# Altium PCB pedala.PcbDoc
Units mm, origin at the board's own origin, x right, y up, seen from the top; angles counter-clockwise.
Board outline 77.25 x 121.25 mm, 2 copper layers (Top Layer, Bottom Layer); 65 components, 53 nets, 200 pads, 0 vias.
Unrouted connection lines stored in the file: 1.
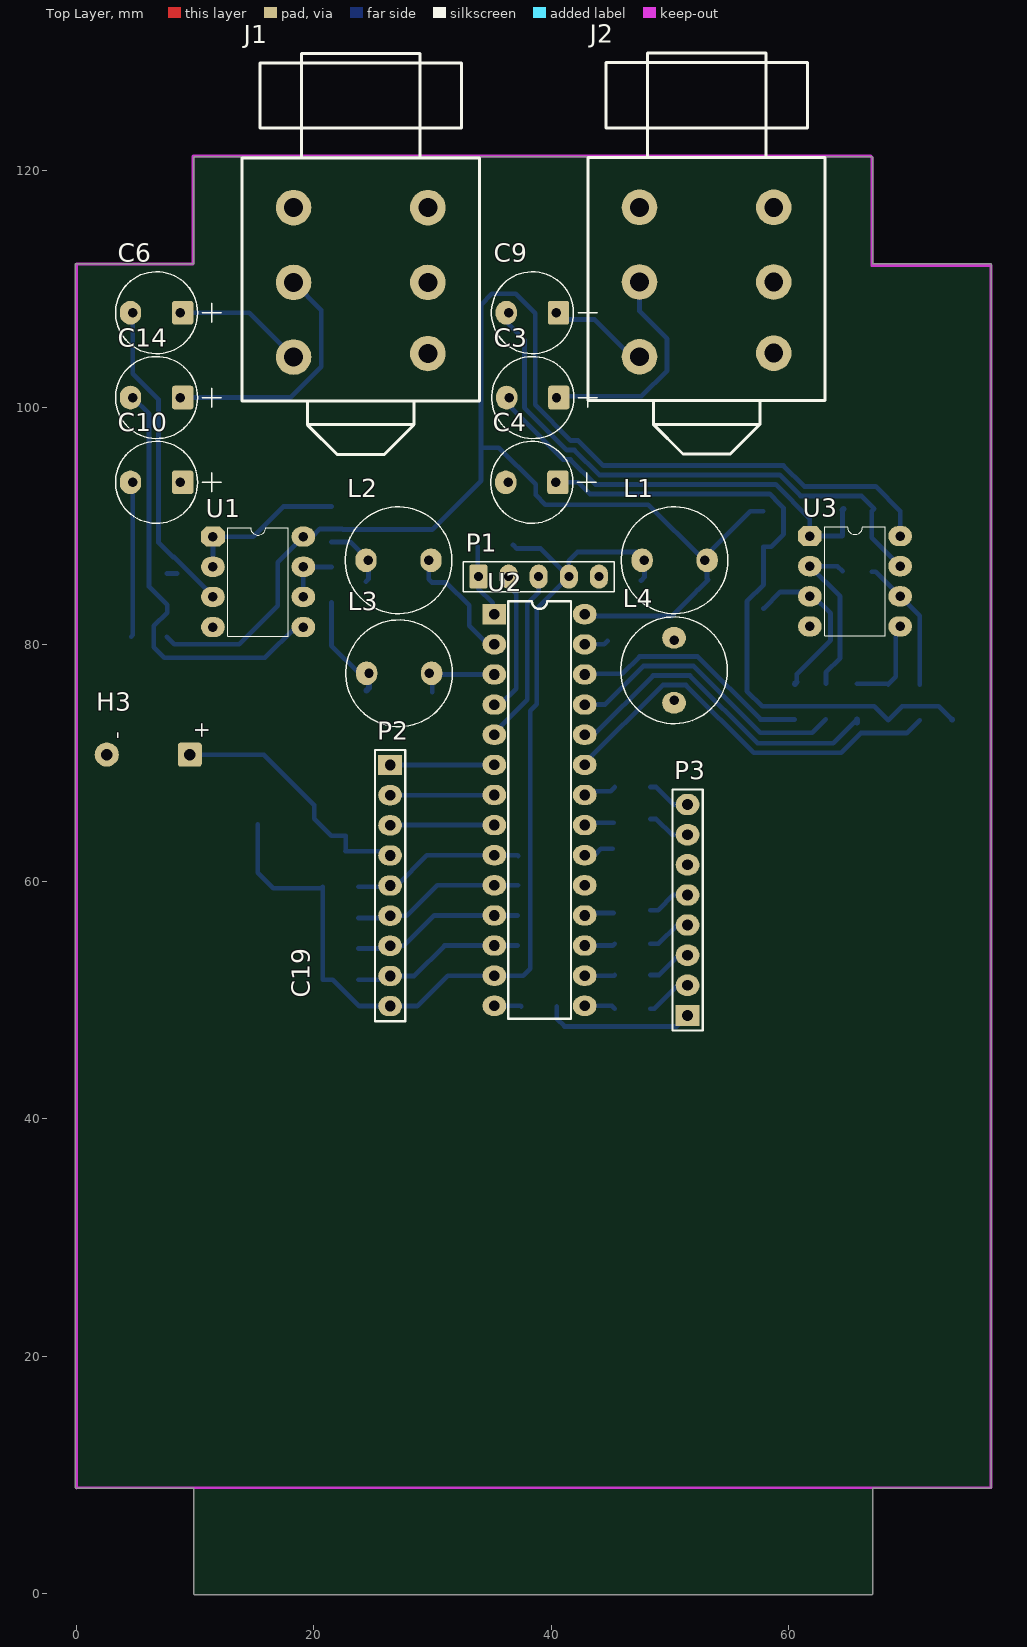
[diagram p0: Top Layer view]
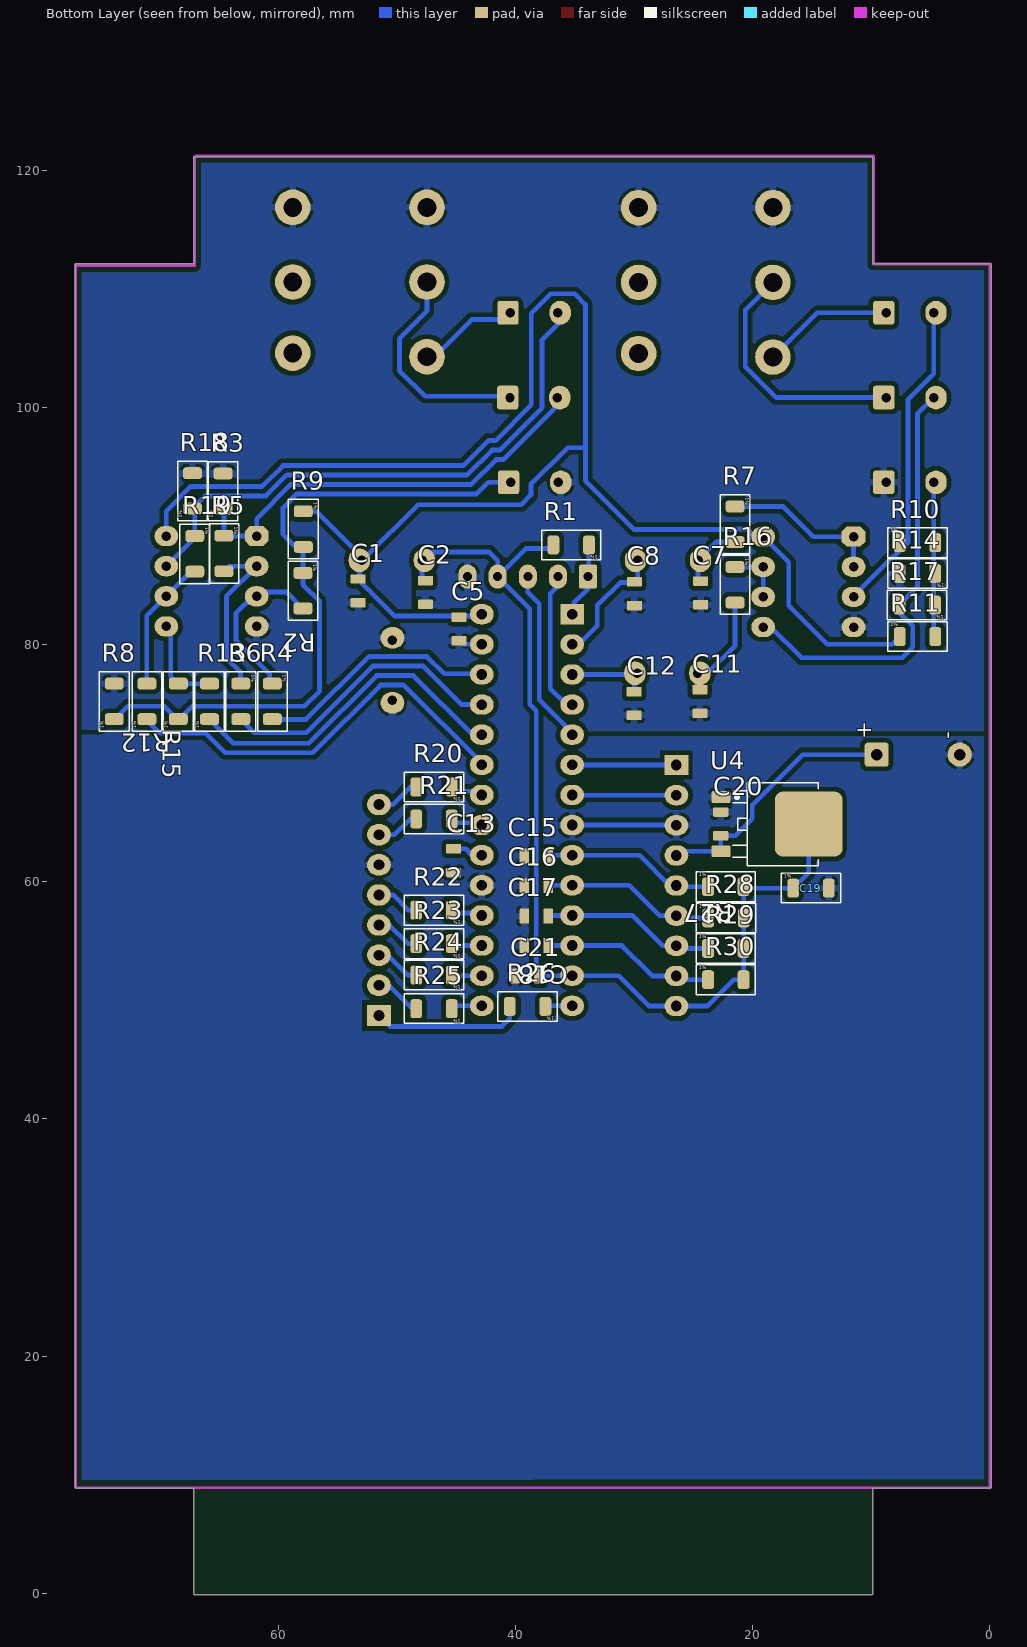
[diagram p1: Bottom Layer view, seen from below]
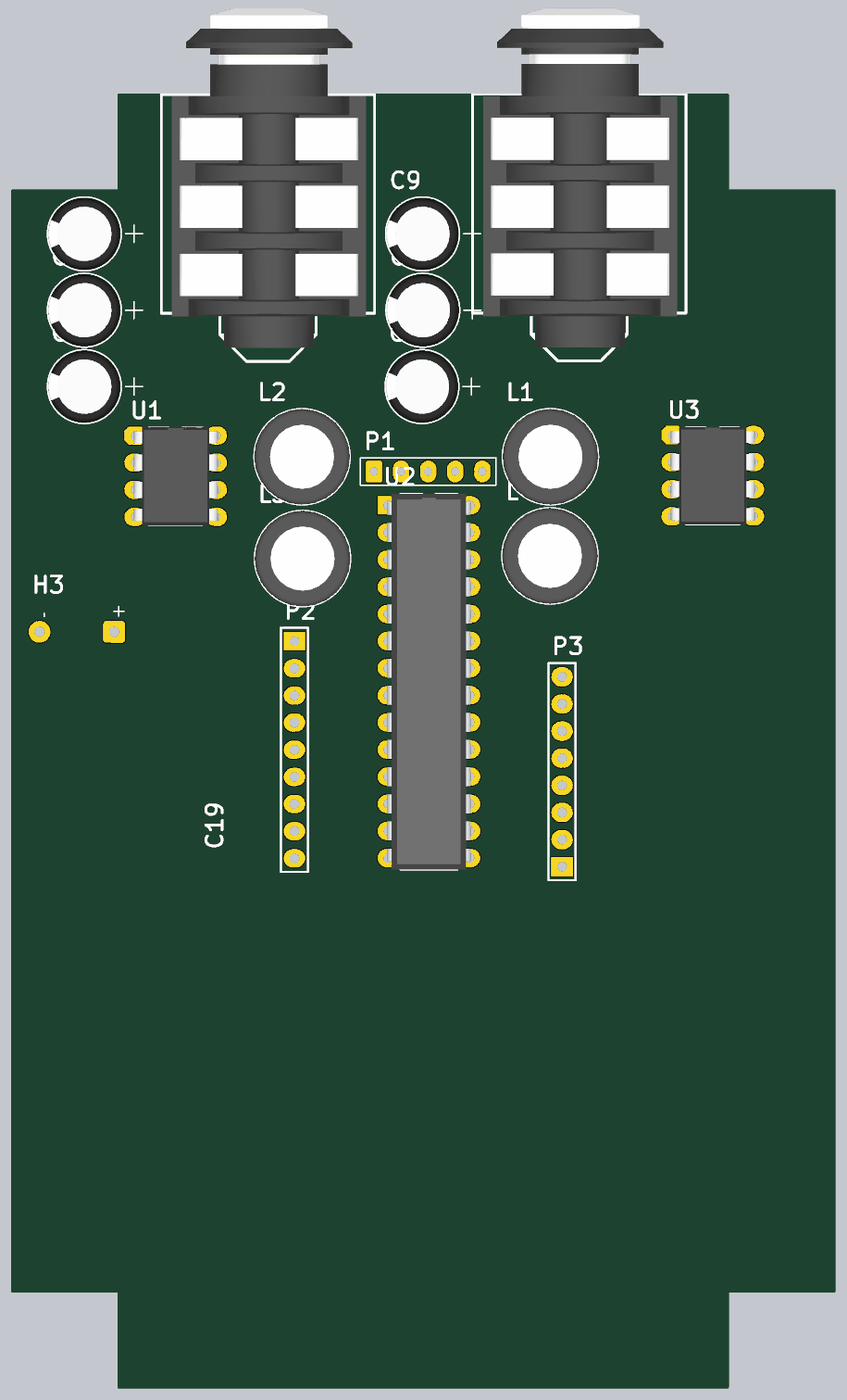
[diagram p2: 3D render of the assembled board from above, using the file's embedded part models]
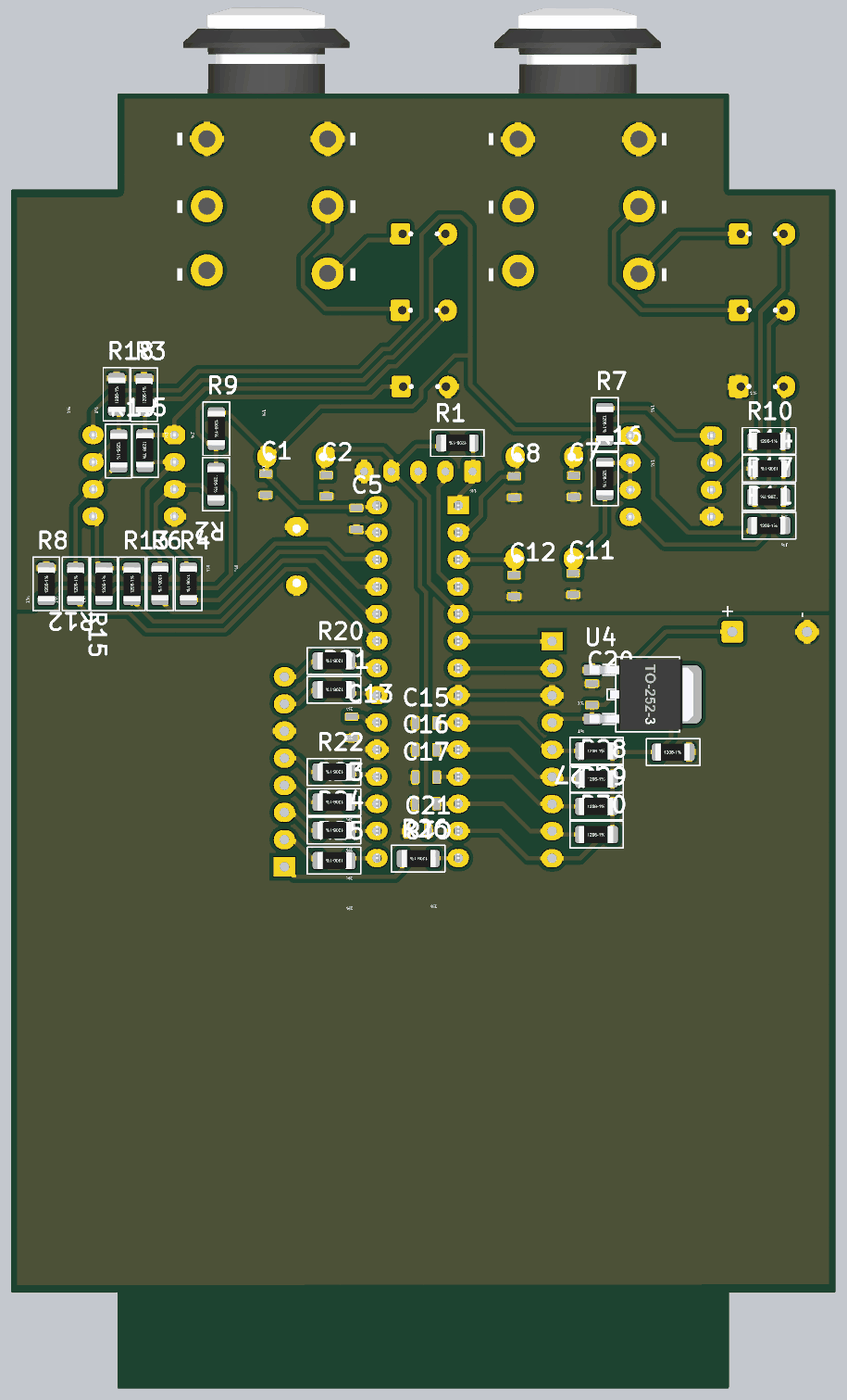
[diagram p3: 3D render of the assembled board from below, using the file's embedded part models]

## Layer stack, top to bottom
Top Solder: solder mask 0.0102, Solder Resist, Dk 3.5
Top Layer: signal copper 0.0356
Dielectric 1: dielectric 0.32, FR-4, Dk 4.8
Bottom Layer: signal copper 0.0356
Bottom Solder: solder mask 0.0102, Solder Resist, Dk 3.5

## Board outline
9.873,0 9.873,8.873 0,8.873 cw(c0,9) -0.127,9 -0.127,112 cw(c0,112) 0,112.127 9.873,112.127 9.873,121 cw(c10,121) 10,121.127 67,121.127 cw(c67,121) 67.127,121 67.127,112.127 77,112.127 cw(c77,112) 77.127,112 77.127,9 cw(c77,9) 77,8.873 67.127,8.873 67.127,0 cw(c67,0) 67,-0.127 10,-0.127 cw(c10,0)

## Design rules (kind name [scope] priority, off if disabled: settings)
Clearance Clearance_1 [InNet('No Net') vs InNet('No Net')] p1: gap=1
Clearance [InNet('GND')] p2: gap=0.4
PlaneClearance [All] p1: clearance=0.3
PlaneConnect [All] p1: planeconnectstyle=Direct reliefexpansion=0.508 reliefentries=4 reliefconductorwidth=0.254 reliefairgap=0.254
PolygonConnect [All] p1: connectstyle=Relief reliefconductorwidth=0.6 reliefentries=4 polygonreliefangle="90 Angle" airgapwidth=0.254
RoutingVias [All] p1: holewidth=0.711 width=1.27 viastyle="Through Hole" minholewidth=0.711 minwidth=1.27 maxholewidth=0.711 maxwidth=1.27
SolderMaskExpansion [All] p1: expansion=0.102
Width [All] p1: maxlimit=0.4 minlimit=0.4 preferedwidth=0.4
28 further rules are at their usual default settings.

## Components (designator, comment, footprint, x,y, rotation, side; value= is the part's Value field where it differs from the comment)
C1 "100n" 0805-CAP-HC#1 53.26,84.53 r90 bottom
C2 "100n" 0805-CAP-HC#1 47.59,84.4 r90 bottom
C3 "10µ" CAPAE250P680X1220_VERT 38.46,100.83 r180 top
C4 "10µ" CAPAE250P680X1220_VERT 38.38,93.68 r180 top
C5 "100n" 0805-CAP-HC#1 44.77,81.31 r90 bottom
C6 "10µ" CAPAE250P680X1220_VERT 6.74,107.98 r180 top
C7 "100n" 0805-CAP-HC#1 24.39,84.36 r90 bottom
C8 "100n" 0805-CAP-HC#1 29.97,84.29 r90 bottom
C9 "10µ" CAPAE250P680X1220_VERT 38.43,107.98 r180 top
C10 "10µ" CAPAE250P680X1220_VERT 6.74,93.68 r180 top
C11 "100n" 0805-CAP-HC#1 24.45,75.2 r90 bottom
C12 "100n" 0805-CAP-HC#1 29.99,75.03 r90 bottom
C13 "100n" 0805-CAP-HC#1 45.209,61.78 r90 bottom
C14 "10µ" CAPAE250P680X1220_VERT 6.74,100.83 r180 top
C15 "100n" 0805-CAP-HC#2 38.24,62.177 r0 bottom
C16 "100n" 0805-CAP-HC#2 38.24,59.67 r0 bottom
C17 "100n" 0805-CAP-HC#2 38.24,57.107 r0 bottom
C18 "100n" 0805-CAP-HC#2 38.25,54.63 r0 bottom
C19 "10µ" R1206-1% 15.08,59.46 r180 bottom
C20 "100n" 0805-CAP-HC#1 22.69,64.88 r270 bottom
C21 "100n" 0805-CAP-HC#1 39.03,52.07 r180 bottom
H3 "BATTERY" HDR_1X2X276 6.04,70.72 r270 top
J1 "Phone-Jack 6.3mm Stereo SW" "PHONE-JACK STEREO SW 6.3MM" 15.75,104.24 r0 top
J2 "Phone-Jack 6.3mm Stereo SW" "PHONE-JACK STEREO SW 6.3MM" 44.92,104.27 r0 top
L1 "INDC_180u_Toroid" DR-CW8A 50.42,87.11 r180 top
L2 "INDC_180u_Toroid" DR-CW8A 27.14,87.11 r0 top
L3 "INDC_180u_Toroid" DR-CW8A 27.19,77.58 r0 top
L4 "INDC_180u_Toroid" Dr-CW8A 50.37,77.83 r270 top
P1 "Programmer" HDR1X5_2.54MMP 33.88,85.73 r0 top
P2 "Header 9" HDR1X9 26.43,69.84 r270 top
P3 "Header 8" HDR1X8 51.51,48.73 r90 top
R1 "Thick Film" R1206-1% 35.3,88.4 r0 bottom
R2 "Thick Film" R1206-1% 57.92,84.54 r270 bottom
R3 "Thick Film" R1206-1% 64.66,92.93 r90 bottom
R4 "Thick Film" R1206-1% 60.5,75.21 r270 bottom
R5 "Thick Film" R1206-1% 64.58,87.68 r270 bottom
R6 "Thick Film" R1206-1% 63.16,75.21 r270 bottom
R7 "Thick Film" R1206-1% 21.48,90.15 r270 bottom
R8 "Thick Film" R1206-1% 73.83,75.21 r90 bottom
R9 "Thick Film" R1206-1% 57.89,89.74 r270 bottom
R10 "Thick Film" R1206-1% 6.1,88.59 r180 bottom
R11 "Thick Film" R1206-1% 6.1,80.67 r180 bottom
R12 "Thick Film" R1206-1% 68.43,75.21 r90 bottom
R13 "Thick Film" R1206-1% 65.8,75.21 r90 bottom
R14 "Thick Film" R1206-1% 6.1,85.99 r0 bottom
R15 "Thick Film" R1206-1% 71.08,75.21 r90 bottom
R16 "Thick Film" R1206-1% 21.48,85.04 r270 bottom
R17 "Thick Film" R1206-1% 6.13,83.34 r0 bottom
R18 "Thick Film" R1206-1% 67.24,92.96 r90 bottom
R19 "Thick Film" R1206-1% 67.04,87.65 r270 bottom
R20 "Thick Film" R1206-1% 46.87,67.99 r0 bottom
R21 "Thick Film" R1206-1% 46.87,65.29 r0 bottom
R22 "Thick Film" R1206-1% 46.87,57.6 r0 bottom
R23 "Thick Film" R1206-1% 46.87,54.78 r0 bottom
R24 "Thick Film" R1206-1% 46.87,52.13 r0 bottom
R25 "Thick Film" R1206-1% 46.87,49.3 r0 bottom
R26 "Thick Film" R1206-1% 38.98,49.49 r0 bottom
R27 "Thick Film" R1206-1% 22.26,59.58 r180 bottom
R28 "Thick Film" R1206-1% 22.25,56.95 r180 bottom
R29 "Thick Film" R1206-1% 22.26,54.38 r180 bottom
R30 "Thick Film" R1206-1% 22.26,51.74 r180 bottom
U1 "OPA2350" DIL8-300A 15.3,85.29 r270 top
U2 "DSPIC33FJ128GP802-I/SP" DIP28-300 39.03,66.05 r0 top
U3 "OPA2350" DIL8-300A 65.63,85.34 r270 top
U4 "lm117 3v3" TO-252 18.97,64.86 r270 bottom

## Footprints (in the part's own frame and the unit in brackets; to place one, negate y for a bottom-side part, rotate by r counter-clockwise, add the part's x,y. Pads: shape width x height; smd on the part's side, far side on the other; paste and mask are expansions set on the pad)
0805-CAP-HC#1 [mm] "Capacitor, 0805, High Capacity"
  rrect20% 0.8x1.27 smd paste-0.076 mask+0.051: 1(-1,0) 2(1,0)
  body extent -1,-0.63 1,0.63, height 1.26
0805-CAP-HC#2 [mm] "Capacitor, 0805, High Capacity"
  rrect20% 0.8x1.27 smd paste-0.076 mask+0.051: 1(1,0) 2(-1,0)
  body extent -1,-0.63 1,0.63, height 1.26
CAPAE250P680X1220_VERT [mm]
  round 0.508 on Mech15: 0(0,0)
  rrect25% 1.8x2 hole 0.8 copper offset -0.2,0: 1(-2,0)
  oval 1.8x2 hole 0.8 copper offset 0.2,0: 2(2,0)
  silkscreen extent -5.45,-3.46 3.46,3.46, body extent -3.37,-3.37 3.37,3.37, height 12.2
DIL8-300A [mm]
  oct 1.7x2 hole 0.8: 1(-3.81,-3.81)
  oval 1.7x2 hole 0.8: 2(-1.27,-3.81) 3(1.27,-3.81) 4(3.81,-3.81) 5(3.81,3.81) 6(1.27,3.81) 7(-1.27,3.81) 8(-3.81,3.81)
  silkscreen extent -4.58,-2.54 4.58,2.54, body extent -4.58,-3.96 4.58,3.96, height 3.88
DIP28-300 [mm] "DIP 28 Leads, Row Spacing 7.62mm; Pitch 2.54mm"
  rect 2x1.7 hole 0.9: 1(-3.81,16.51)
  oval 2x1.7 hole 0.9: 2(-3.81,13.97) 3(-3.81,11.43) 4(-3.81,8.89) 5(-3.81,6.35) 6(-3.81,3.81) 7(-3.81,1.27) 8(-3.81,-1.27) 9(-3.81,-3.81) 10(-3.81,-6.35) 11(-3.81,-8.89) 12(-3.81,-11.43) 13(-3.81,-13.97) 14(-3.81,-16.51) 15(3.81,-16.51) 16(3.81,-13.97) 17(3.81,-11.43) 18(3.81,-8.89) 19(3.81,-6.35) 20(3.81,-3.81) 21(3.81,-1.27) 22(3.81,1.27) 23(3.81,3.81) 24(3.81,6.35) 25(3.81,8.89) 26(3.81,11.43) 27(3.81,13.97) 28(3.81,16.51)
  silkscreen extent -2.65,-17.59 2.65,17.59, body extent -3.93,-17.59 3.94,17.59, height 4.57
DR-CW8A [mm]
  oval 1.8x2 hole 0.8 copper offset -0.2,0: 1(-2.54,0)
  oval 1.8x2 hole 0.8 copper offset 0.2,0: 2(2.54,0)
  silkscreen extent -4.5,-4.5 4.5,4.5, body extent -4.5,-4.5 4.5,4.5, height 13.27
Dr-CW8A [mm]
  oval 1.8x2 hole 0.8 copper offset -0.2,0: 1(-2.54,0)
  oval 1.8x2 hole 0.8 copper offset 0.2,0: 2(2.54,0)
  silkscreen extent -4.5,-4.5 4.5,4.5, body extent -4.5,-4.5 4.5,4.5, height 13.27
HDR1X5_2.54MMP [mil] "Connector; Header; 5 Position 0.100\" pitch"
  rrect25% 60x80 hole 30: 1(0,0)
  oval 60x80 hole 30: 2(100,0) 3(200,0) 4(300,0) 5(400,0)
  silkscreen extent -50,-50 450,50
HDR1X8 [mm] "Connector; Header; 8 Position"
  rect 1.8x2 hole 0.9: 1(0,0)
  oval 1.8x2 hole 0.9: 2(2.54,0) 3(5.08,0) 4(7.62,0) 5(10.16,0) 6(12.7,0) 7(15.24,0) 8(17.78,0)
  silkscreen extent -1.27,-1.27 19.05,1.27
HDR1X9 [mm] "Connector; Header; 9 Position"
  rect 1.7x2 hole 0.9: 1(0,0)
  oval 1.7x2 hole 0.9: 2(2.54,0) 3(5.08,0) 4(7.62,0) 5(10.16,0) 6(12.7,0) 7(15.24,0) 8(17.78,0) 9(20.32,0)
  silkscreen extent -1.27,-1.27 21.59,1.27
HDR_1X2X276 [mil]
  rrect25% 80x80 hole 38: 1(0,137.8)
  round 80 hole 38: 2(0,-137.8)
  body extent -20,-158 20,158
"PHONE-JACK STEREO SW 6.3MM" [mm] "SJ-6306"
  round 3 hole 1.6: 1(2.54,0) 2(2.54,6.3) 3(2.54,12.6) 4(13.86,12.6) 5(13.86,6.3) 6(13.86,0.3)
  silkscreen extent -1.8,-8.2 18.2,25.6, body extent -0.81,-6.93 17.39,24.86, height 16
R1206-1% [mm]
  rrect50% 1x1.6 smd: 1(-1.5,0) 2(1.5,0)
  silkscreen extent -2.5,-1.25 2.5,1.25, body extent -1.65,-0.81 1.55,0.79, height 0.6
TO-252 [mm] "D-PAK/TO-252-AA; 3 Leads (1 Cropped); Body 10.3 (inc. leads) x 6.7 mm (LxW max)"
  round 0.5 on Mech15: 0(0,0)
  rrect25% 1x1.6 smd: 1(-2.285,-3.7) 3(2.285,-3.7)
  rrect25% 5.5x5.7 smd: 2(0,3.7)
  silkscreen extent -3.5,-2.7 3.5,4.5, body extent -3.3,-3.95 3.3,5.76, height 2.31

## Part data
C1 C2 C5 C7 C8 C11 C12 C13 C15 C16 C17 C18 C20 C21: library part CAPC_100n_1206_NP0_50V_5%, "Capacitor SMD Cer 100nF 1206 NP0 50V 5%"
C3 C4 C6 C9 C10 C14 C19: library part CAPT_330u_2917_6V3, "Capacitor SMD Tant 330uF 20% 6V3 2917"
H3: library part Header2P, "Header, 2-pin"
L1 L2 L3 L4: "Power Inductor 180µH 10% SMD Toroid"
P1: library part Header5P, "Header 5-pin"
P2: "Header, 9-Pin"
P3: "Header, 8-Pin"
R1 R2 R3 R4 R5 R6 R7 R8 R9 R10 R11 R12 R13 R14 R15 R16 R17 R18 R19 R20 R21 R22 R23 R24 R25 R26 R27 R28 R29 R30: library part RES_1M_0805_5%, "Resistor SMD chip 1M Ohm 0.125W 5% 0805"
U1 U3: library part OPA2313ID, "1-MHz, Micropower, Low-Noise, Rail-to-Rail I/O Operational Amplifier, 1.8 to 5.5 V, -40 to 125 degC, 8-pin SOIC (D8), Green (RoHS & no Sb/Br)"
U2: "High-Performance 16-bit Digital Signal Controller, 128 KB Flash, 16 KB RAM, 28-Pin SPDIP, Industrial Temperature"
U4: library part TL317CLP, "Adjustable Regulator with 5 to 38 V Input and 1.2 to 32 V Output, 0 to 125 degC, 3-Pin TO-92 (LP), Pb-Free (RoHS)"

## Nets (pads, with @x,y where several pads share a name; then routed paths per layer and width w, separated by ;. In a path a pad name is that pad's centre, name@x,y a point inside that pad or via, vN(x,y) a via of type N, cw(c..) or ccw(c..) an arc to the next point about the centre after c; other vN are vias at no path point)
AGND: C1.1 C4.2 C5.1 C7.1 C8.1 C10.1 C11.1 C12.1 J1.3 J1.4 J2.3 J2.4 L4.1 R3.2 R8.2 R14.2 R18.2 U1.4 U2.27 U3.4 | length 3.8
  Bottom Layer w0.4: R14.2 8.471,85.99 ; U2.27@43.13,80.31 U2.27 44.48,80.02 C5.1 ; L4.1@50.07,80.07 L4.1
"AUDIO IN LEFT": C6.1 J1.1 | length 11.1
  Bottom Layer w0.4: C6.1 14.55,107.98 J1.1
"AUDIO IN RIGHT": C14.1 J1.2 | length 21
  Bottom Layer w0.4: C14.1 18.01,100.83 20.62,103.44 20.62,108.21 J1.2
BUT1: C15.2 P2.5 R27.1 U2.9 | length 14.6
  Bottom Layer w0.4: R27.1 26.33,59.58 P2.5 26.98,59.68 29.54,62.24 U2.9 37.177,62.24 C15.2
BUT2: C16.2 P2.6 R28.1 U2.10 | length 14.6
  Bottom Layer w0.4: R28.1 26.24,56.95 P2.6 27.84,57.14 30.4,59.7 U2.10 C16.2@37.21,59.7
BUT3: C17.2 P2.7 R29.1 U2.11 | length 14.6
  Bottom Layer w0.4: R29.1 26.21,54.38 P2.7 27.6,54.6 30.16,57.16 U2.11 C17.2@37.187,57.16
BUT4: C18.2 P2.8 R30.1 U2.12 | length 14.6
  Bottom Layer w0.4: R30.1 26.11,51.74 P2.8 28.46,52.06 31.02,54.62 U2.12 C18.2@37.17,54.62
D1: R26.1 U2.14 | length 2.3
  Bottom Layer w0.4: U2.14 37.43,49.54 R26.1
D2: R25.1 U2.15 | length 2.6
  Bottom Layer w0.4: U2.15 45.13,49.54 R25.1
D3: R24.1 U2.16 | length 2.6
  Bottom Layer w0.4: U2.16 45.32,52.08 R24.1
D4: R23.1 U2.17 | length 2.6
  Bottom Layer w0.4: U2.17 45.21,54.62 R23.1
D5: R22.1 U2.18 | length 2.1
  Bottom Layer w0.4: U2.18@43.19,57.37 R22.1@45.28,57.37
D6: R21.1 U2.21 | length 2
  Bottom Layer w0.4: U2.21@43.27,64.97 R21.1@45.29,64.97
D7: R20.1 U2.22 | length 2.8
  Bottom Layer w0.4: U2.22 43.16,67.64 45.02,67.64 R20.1
DAC1A: R15.1 U2.23 | length 34.6
  Bottom Layer w0.4: U2.23@42.7,70.08 42.9,70.08 49.41,76.59 51.376,76.59 57.086,70.88 64.462,70.88 66.122,72.54 70,72.54 R15.1@71.08,73.62
DAC1B: R13.1 U2.24 | length 28.6
  Bottom Layer w0.4: U2.24@42.7,72.45 43.66,72.45 48.6,77.39 51.707,77.39 57.417,71.68 63.79,71.68 R13.1@65.8,73.69
  Bottom Layer w0.5: R13.1@65.8,73.42 R13.1@65.8,73.69
DAC2A: R6.2 U2.25 | length 24.5
  Bottom Layer w0.4: U2.25 44.541,74.94 47.791,78.19 52.039,78.19 57.659,72.57 62.02,72.57 R6.2
DAC2B: R4.2 U2.26 | length 20.7
  Bottom Layer w0.4: U2.26@42.7,77.53 46,77.53 47.46,78.99 52.37,78.99 57.67,73.69 R4.2@60.56,73.69
GND: C2.1 C13.1 C15.1 C16.1 C17.1 C18.1 C19.2 C20.1 C21.1 H3.2 L4.2 P1.5 P2.3 P3.6 U2.8 U2.19 U4.1 | length 8.8
  Bottom Layer w0.4: P2.3 26.45,64.78 U2.8
"LEFT BUFFER": C8.2 L2.2 U2.2 | length 10.3
  Bottom Layer w0.4: L2.2 29.68,85.52 29.97,85.23 31.17,85.23 33.1,83.3 33.1,81.58 34.61,80.07 U2.2@35.08,80.07
MCLR: P1.1 R1.1 U2.1 | length 6.2
  Bottom Layer w0.4: R1.1@33.81,88.28 33.81,85.8 P1.1 33.88,84.72 35.08,83.52 U2.1@35.08,82.61
NetC3_2: C3.2 R3.1 R5.1 U3.1 | length 36.5
  Bottom Layer w0.4: C3.2 36.46,100.151 41.011,95.6 41.637,95.6 43.737,93.5 58.937,93.5 61.82,90.617 U3.1 64.55,89.15 R5.1 R3.1@64.58,91.35
  Bottom Layer w0.5: R3.1@64.58,91.35 R3.1
NetC4_1: C4.1 R2.1 R8.1 R9.2 R12.1 | length 56.6
  Bottom Layer w0.4: C4.1 42.283,93.68 43.263,92.7 58.432,92.7 59.29,91.842 59.29,91.83 59.61,91.51 59.61,89.3 58.55,88.24 R9.2 57.92,88.21 R2.1 57.92,85.042 56.52,83.642 56.52,76.08 57.8,74.8 59.638,74.8 59.648,74.81 61.452,74.81 61.462,74.8 62.248,74.8 62.258,74.81 64.062,74.81 64.072,74.8 64.888,74.8 64.898,74.81 67.26,74.81 68.43,73.64 69.6,74.81 72.68,74.81 R8.1@73.82,73.67
  Bottom Layer w0.5: R8.1@73.82,73.67 R8.1@73.83,73.66
NetC6_2: C6.2 R10.1 U1.3 | length 26.8
  Bottom Layer w0.4: C6.2 4.74,102.851 6.9,100.691 6.9,88.61 8.12,87.39 8.202,87.39 11.49,84.102 U1.3
NetC7_2: C7.2 L2.1 R7.2 | length 5.7
  Bottom Layer w0.4: R7.2 23.06,88.65 L2.1 24.6,85.51 C7.2@24.39,85.3
NetC9_2: C9.2 R18.1 R19.1 U3.7 | length 47.8
  Bottom Layer w0.4: C9.2@35.65,107.8 37.76,105.69 37.76,99.982 41.342,96.4 41.969,96.4 44.069,94.3 59.269,94.3 61.039,92.53 66.17,92.53 R18.1 67.04,91.26 67.04,89.01 U3.7
  Bottom Layer w0.5: U3.7 U3.7@69.44,86.75
NetC10_2: C10.2 R10.2 R11.2 R14.1 R17.1 | length 13.1
  Bottom Layer w0.4: R11.2 4.74,80.81 C10.2
NetC11_2: C11.2 L3.1 R16.2 | length 9.3
  Bottom Layer w0.4: R16.2 21.48,79.92 23.82,77.58 L3.1
  Bottom Layer w0.5: C11.2@24.45,76.14 24.65,76.34 L3.1
NetC13_2: C13.2 U2.20 | length 2.6
  Bottom Layer w0.4: U2.20 43.67,62.24 44.21,62.78 C13.2
NetC14_2: C14.2 R17.2 U1.5 | length 36.8
  Bottom Layer w0.4: C14.2 6.1,99.47 6.1,84.87 R17.2 7.63,82.702 6.5,81.572 6.5,79.768 7.388,78.88 15.88,78.88 18.48,81.48 U1.5
NetP3_1: P3.1 R26.2 | length 12.7
  Bottom Layer w0.4: R26.2 40.48,48.46 41.14,47.8 50.58,47.8 P3.1
NetP3_2: P3.2 R25.2 | length 4
  Bottom Layer w0.4: R25.2 48.72,49.3 50.69,51.27 P3.2
NetP3_3: P3.3 R24.2 | length 3.8
  Bottom Layer w0.4: R24.2 49.1,52.13 50.78,53.81 P3.3
NetP3_4: P3.4 R23.2 | length 3.8
  Bottom Layer w0.4: R23.2 49.06,54.78 50.63,56.35 P3.4
NetP3_5: P3.5 R22.2 | length 3.7
  Bottom Layer w0.4: R22.2 49.03,57.6 50.32,58.89 P3.5
NetP3_7: P3.7 R21.2 | length 3.7
  Bottom Layer w0.4: R21.2 48.88,65.29 50.2,63.97 P3.7
NetP3_8: P3.8 R20.2 | length 3.8
  Bottom Layer w0.4: R20.2 48.86,67.99 50.34,66.51 P3.8
NetR2_2: R2.2 R4.1 U3.3 | length 14.2
  Bottom Layer w0.4: R2.2 59.32,84.44 61.45,84.44 U3.3 62.13,84.07 63.57,82.63 63.57,80.364 60.72,77.514 R4.1@60.72,76.85
  Bottom Layer w0.5: R4.1@60.56,76.69 R4.1@60.72,76.85
NetR5_2: R5.2 R6.1 U3.2 | length 14.4
  Bottom Layer w0.4: R6.1@63.18,76.7 63.18,77.653 64.37,78.843 64.37,84.06 U3.2 64.15,86.61 R5.2
NetR7_1: R7.1 U1.1 U1.2 | length 13.6
  Bottom Layer w0.4: U1.2 U1.1 14.9,89.1 17.45,91.65 R7.1
NetR12_2: R12.2 R13.2 U3.5 | length 8
  Bottom Layer w0.4: R13.2@65.8,76.69 68.38,76.69 68.43,76.64 69.07,77.28 69.07,81.16 U3.5
NetR15_2: R15.2 R19.2 U3.6 | length 11.4
  Bottom Layer w0.4: R19.2 67.36,86.15 U3.6 71.08,82.43 R15.2@71.08,76.62
NetR16_1: R16.1 U1.6 U1.7 | length 4.9
  Bottom Layer w0.4: U1.6 U1.7 19.13,86.54 R16.1
OUT1: C3.1 J2.2 | length 19.8
  Bottom Layer w0.4: C3.1@40.46,100.35 40.46,101.37 40.88,100.95 47.62,100.95 49.78,103.11 49.78,105.78 47.46,108.1 J2.2
OUT2: C9.1 J2.1 | length 8.7
  Bottom Layer w0.4: C9.1@40.04,107.41 43.69,107.41 46.86,104.24 J2.1@47.46,104.24
PGEC: P1.3 U2.5 | length 14.9
  Bottom Layer w0.4: U2.5@35.08,72.45 37.99,75.36 37.99,83.422 38.96,84.392 P1.3
PGED: P1.2 U2.4 | length 12.2
  Bottom Layer w0.4: U2.4@35.08,74.99 35.78,74.99 37.07,76.28 37.07,84.28 36.42,84.93 P1.2
"RIGHT BUFFER": C12.2 L3.2 U2.3 | length 7.2
  Bottom Layer w0.4: C12.2@29.99,75.97 29.98,75.98 29.98,77.33 L3.2 29.83,77.48 U2.3
RX: P2.1 U2.6 | length 8.8
  Bottom Layer w0.4: P2.1 35.2,69.84 U2.6
TX: P2.2 U2.7 | length 8.8
  Bottom Layer w0.4: P2.2 35.2,67.3 U2.7
VCC: C20.2 H3.1 P2.4 U4.3 | length 21.9
  Bottom Layer w0.4: H3.1 15.79,70.72 20.04,66.47 20.04,65.32 21.48,63.88 C20.2 22.69,62.595 U4.3 26.075,62.575 P2.4
"VCC ANA": C1.2 C5.2 L1.1 R9.1 R11.1 U1.8 U2.28 U3.8 | length 143.1
  Bottom Layer w0.4: R11.1 8.24,80.03 13.69,80.03 16.95,83.29 16.95,86.94 U1.8 19.85,89.1 20.5,89.75 22.382,89.75 22.432,89.7 29.98,89.7 34.1,93.82 34.1,108.671 35.009,109.58 37.02,109.58 38.66,107.94 38.66,100.213 41.673,97.2 42.3,97.2 44.4,95.1 59.6,95.1 61.37,93.33 67.372,93.33 69.44,91.262 U3.8 ; 34.1,96.6 35.6,96.6 38.7,93.5 38.7,92.613 39.513,91.8 48.2,91.8 52.78,87.22 56.8,91.24 R9.1 ; U2.28@42.7,82.61 42.7,82.407 46.746,82.407 46.753,82.4 48.427,82.4 48.434,82.407 50.198,82.407 52.025,84.235 52.025,84.242 52.43,84.647 52.438,84.647 53.26,85.47 53.15,85.58 L1.1@53.15,87.2
"VCC DIGI": C2.2 C19.1 C21.2 L1.2 P1.4 P2.9 R1.2 R27.2 R28.2 R29.2 R30.2 U2.13 U4.2 | length 88.1
  Bottom Layer w0.4: U4.2 15.27,60.77 C19.1 20.64,59.46 R27.2 R29.2 R30.2 21.6,51.74 23.82,49.52 P2.9 28.72,49.52 31.28,52.08 U2.13 37.66,52.08 38.25,52.67 38.25,56.26 38.24,56.27 38.24,57.943 38.25,57.953 38.25,58.823 38.24,58.833 38.24,60.507 38.25,60.517 38.25,61.33 38.24,61.34 38.24,74.42 38.79,74.97 38.79,83.02 P1.4 ; R1.2 37.1,88.1 39.13,88.1 P1.4 ; C2.2 47.88,85.69 L1.2 47.19,87.8 42.23,87.8 41.5,87.07 P1.4
pads on no net: C3.0 C4.0 C6.0 C9.0 C10.0 C14.0 J1.5 J1.6 J2.5 J2.6 U4.0

## Polygon pours and split planes (outlines as drawn)
AGND on Bottom Layer "Bottom Layer-No Net" (solid, remove dead copper, pour order 11): -0.039,72.665 -0.019,72.685 38.431,72.685 38.431,82.705 43.051,87.325 43.481,87.755 48.791,87.755 48.791,82.825 48.471,82.505 48.064,82.098 42.791,82.098 42.081,81.388 42.081,73.945 47.241,73.945 49.221,75.925 49.391,76.095 51.351,76.095 51.657,76.095 57.177,70.575 59.407,72.805 77.141,72.805 77.204,72.868 77.204,111.744 67.297,111.744 67.219,111.823 67.14,111.901 67.14,120.813 10.014,120.813 9.994,120.793 9.964,120.763 9.964,111.823 0.024,111.823 -0.006,111.793
GND on Bottom Layer "Bottom Layer-No Net 1" (solid, remove dead copper, pour order 9): 77.276,9.549 -0.05,9.639 -0.05,72.8 33.7,72.7 37.1,92.5 48.607,88.137 48.9,83.2 77,72.8

## Keep-outs
Keep-Out Layer:
  lines w0.254: -0.034,8.967 -0.034,112.098 9.82,112.098 9.82,121.18 66.986,121.18 67.049,121.118 67.049,111.981 67.08,111.95 77.077,111.95 77.118,111.99 77.118,9 ; 0,8.862 77.097,8.944

## Text inside footprints (layer, text, board x,y; h text height)
C19: Bottom Overlay "1%" at 17.33,60.21 h0.5
H3: Top Overlay "+" at 9.54,72.02 h2.29 r270; Top Overlay "-" at 2.54,72.02 h2.29 r270; Bottom Overlay "-" at 2.54,72.02 h2.29 r270; Bottom Overlay "+" at 9.54,72.02 h2.29 r270
R1: Bottom Overlay "1%" at 33.05,87.65 h0.5 r180
R2: Bottom Overlay "1%" at 57.17,86.79 h0.5 r90
R3: Bottom Overlay "1%" at 65.41,90.68 h0.5 r270
R4: Bottom Overlay "1%" at 59.75,77.46 h0.5 r90
R5: Bottom Overlay "1%" at 63.83,89.93 h0.5 r90
R6: Bottom Overlay "1%" at 62.41,77.46 h0.5 r90
R7: Bottom Overlay "1%" at 20.73,92.4 h0.5 r90
R8: Bottom Overlay "1%" at 74.58,72.96 h0.5 r270
R9: Bottom Overlay "1%" at 57.14,91.99 h0.5 r90
R10: Bottom Overlay "1%" at 8.35,89.34 h0.5
R11: Bottom Overlay "1%" at 8.35,81.42 h0.5
R12: Bottom Overlay "1%" at 69.18,72.96 h0.5 r270
R13: Bottom Overlay "1%" at 66.55,72.96 h0.5 r270
R14: Bottom Overlay "1%" at 3.85,85.24 h0.5 r180
R15: Bottom Overlay "1%" at 71.83,72.96 h0.5 r270
R16: Bottom Overlay "1%" at 20.73,87.29 h0.5 r90
R17: Bottom Overlay "1%" at 3.88,82.59 h0.5 r180
R18: Bottom Overlay "1%" at 67.99,90.71 h0.5 r270
R19: Bottom Overlay "1%" at 66.29,89.9 h0.5 r90
R20: Bottom Overlay "1%" at 44.62,67.24 h0.5 r180
R21: Bottom Overlay "1%" at 44.62,64.54 h0.5 r180
R22: Bottom Overlay "1%" at 44.62,56.85 h0.5 r180
R23: Bottom Overlay "1%" at 44.62,54.03 h0.5 r180
R24: Bottom Overlay "1%" at 44.62,51.38 h0.5 r180
R25: Bottom Overlay "1%" at 44.62,48.55 h0.5 r180
R26: Bottom Overlay "1%" at 36.73,48.74 h0.5 r180
R27: Bottom Overlay "1%" at 24.51,60.33 h0.5
R28: Bottom Overlay "1%" at 24.5,57.7 h0.5
R29: Bottom Overlay "1%" at 24.51,55.13 h0.5
R30: Bottom Overlay "1%" at 24.51,52.49 h0.5